# Altium PCB DDS_RIKEN_2014.PcbDoc (part 1 of 3)
Units mm, origin at the board's own origin, x right, y up, seen from the top; angles counter-clockwise.
Board outline 224 x 140 mm, 4 copper layers (TopLayer, Ground, Power, BottomLayer); 166 components, 282 nets, 1126 pads, 429 vias.
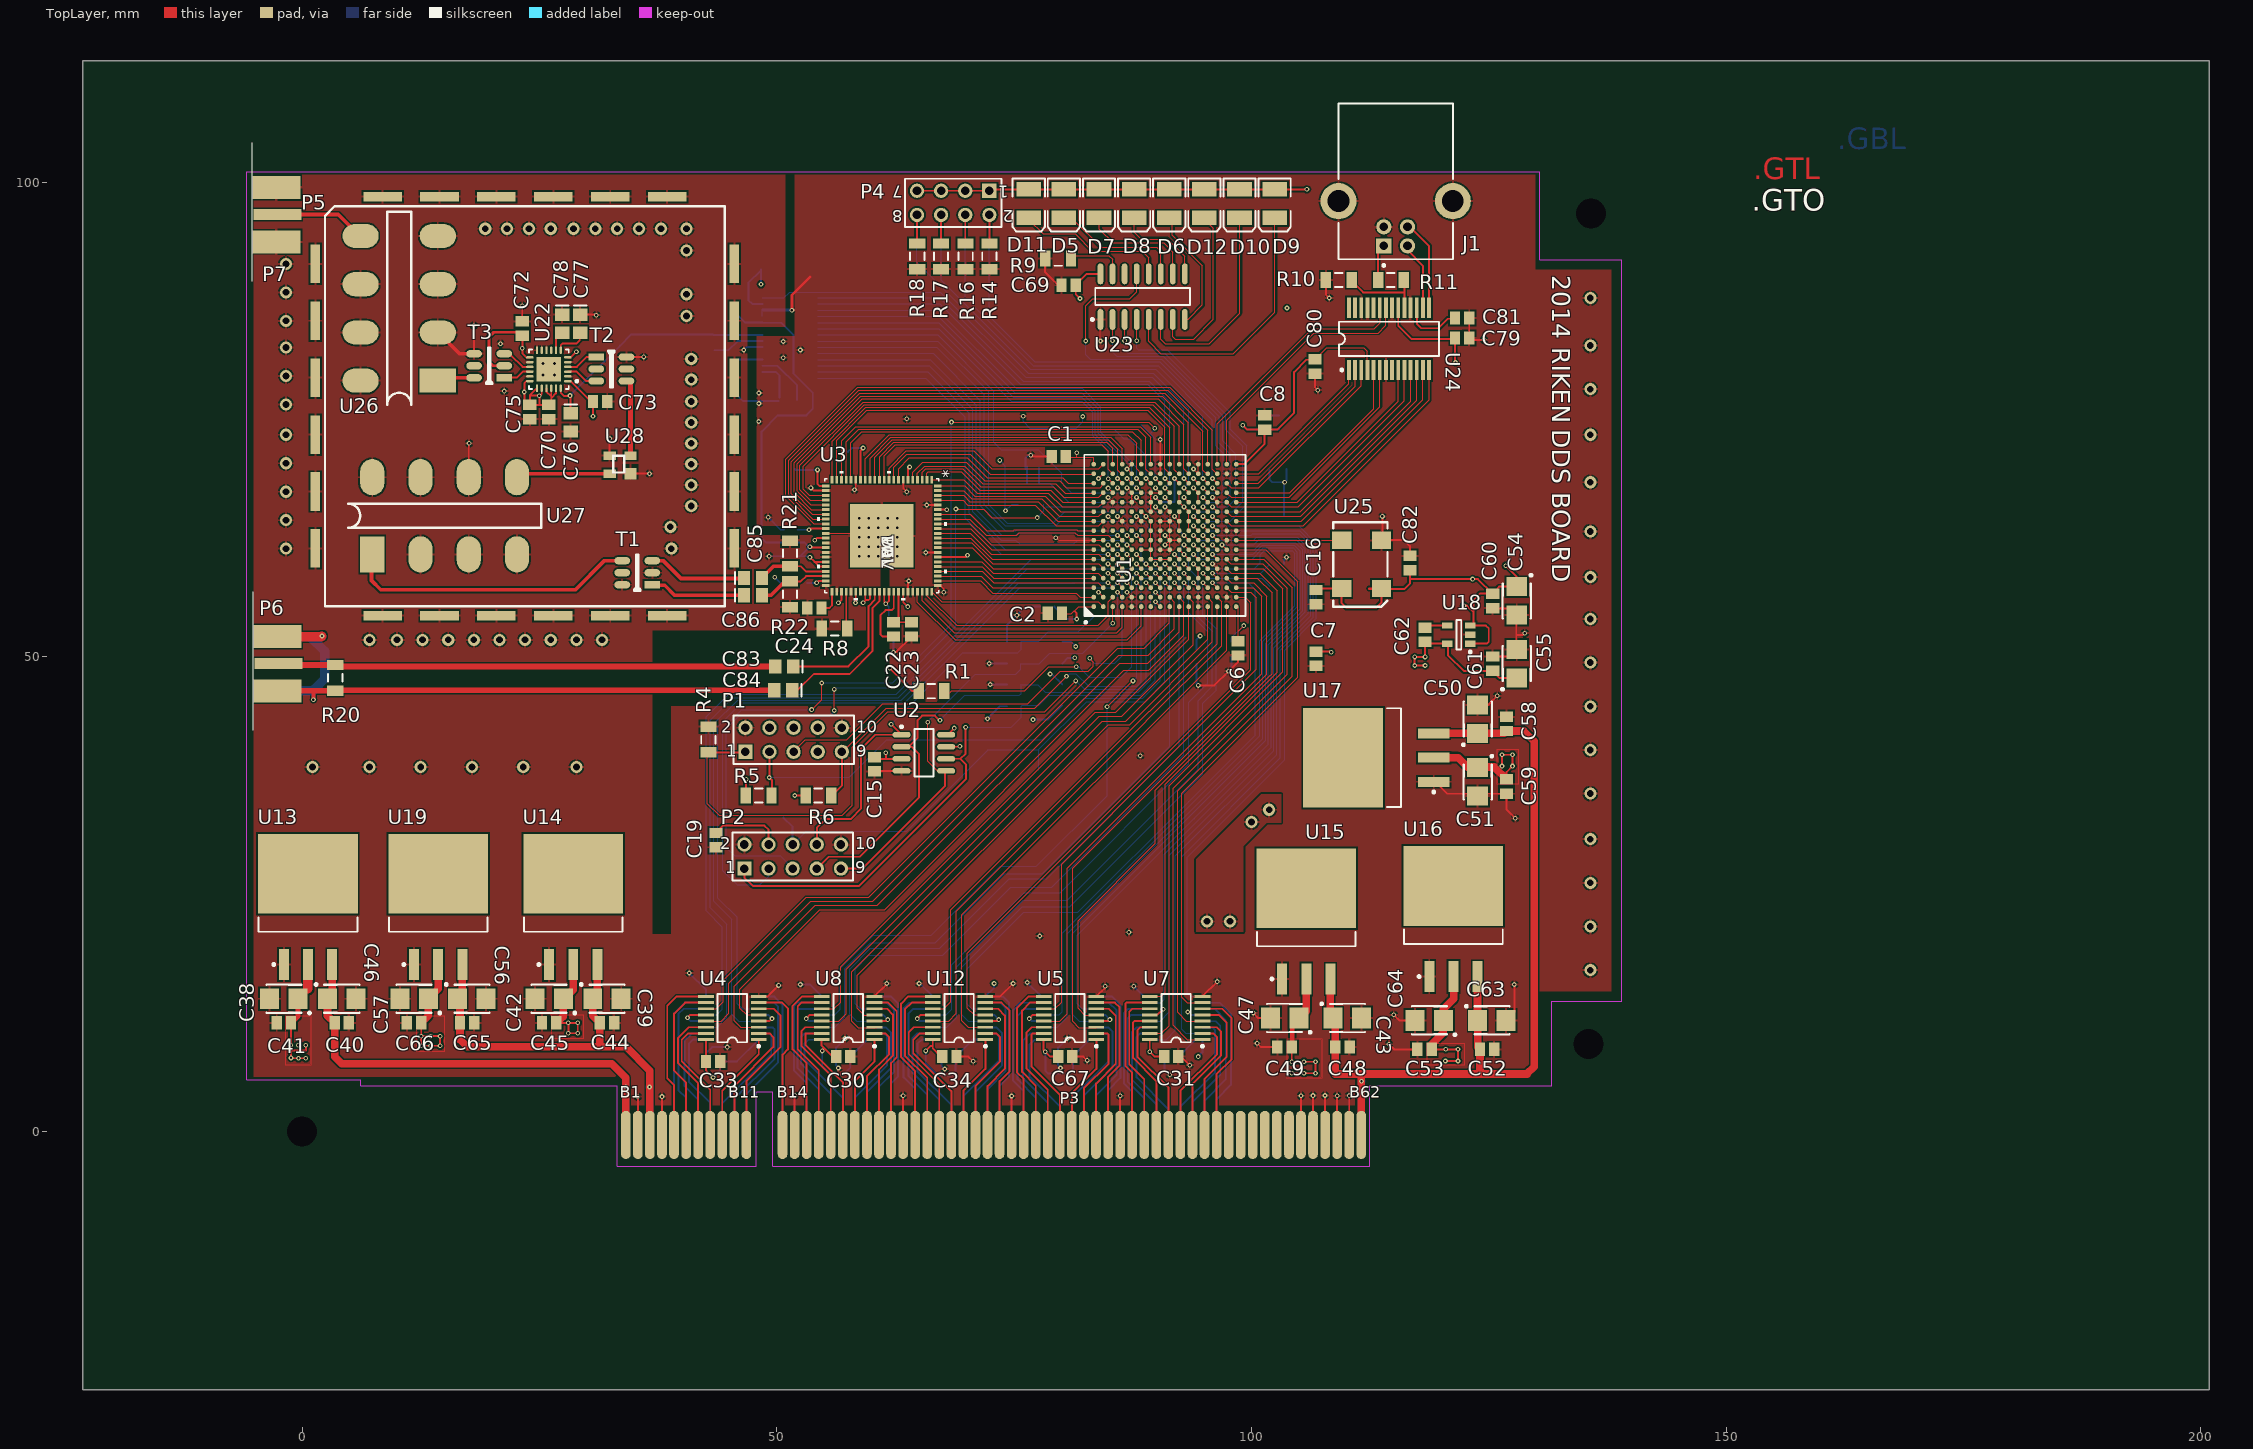
[diagram p0: TopLayer view]
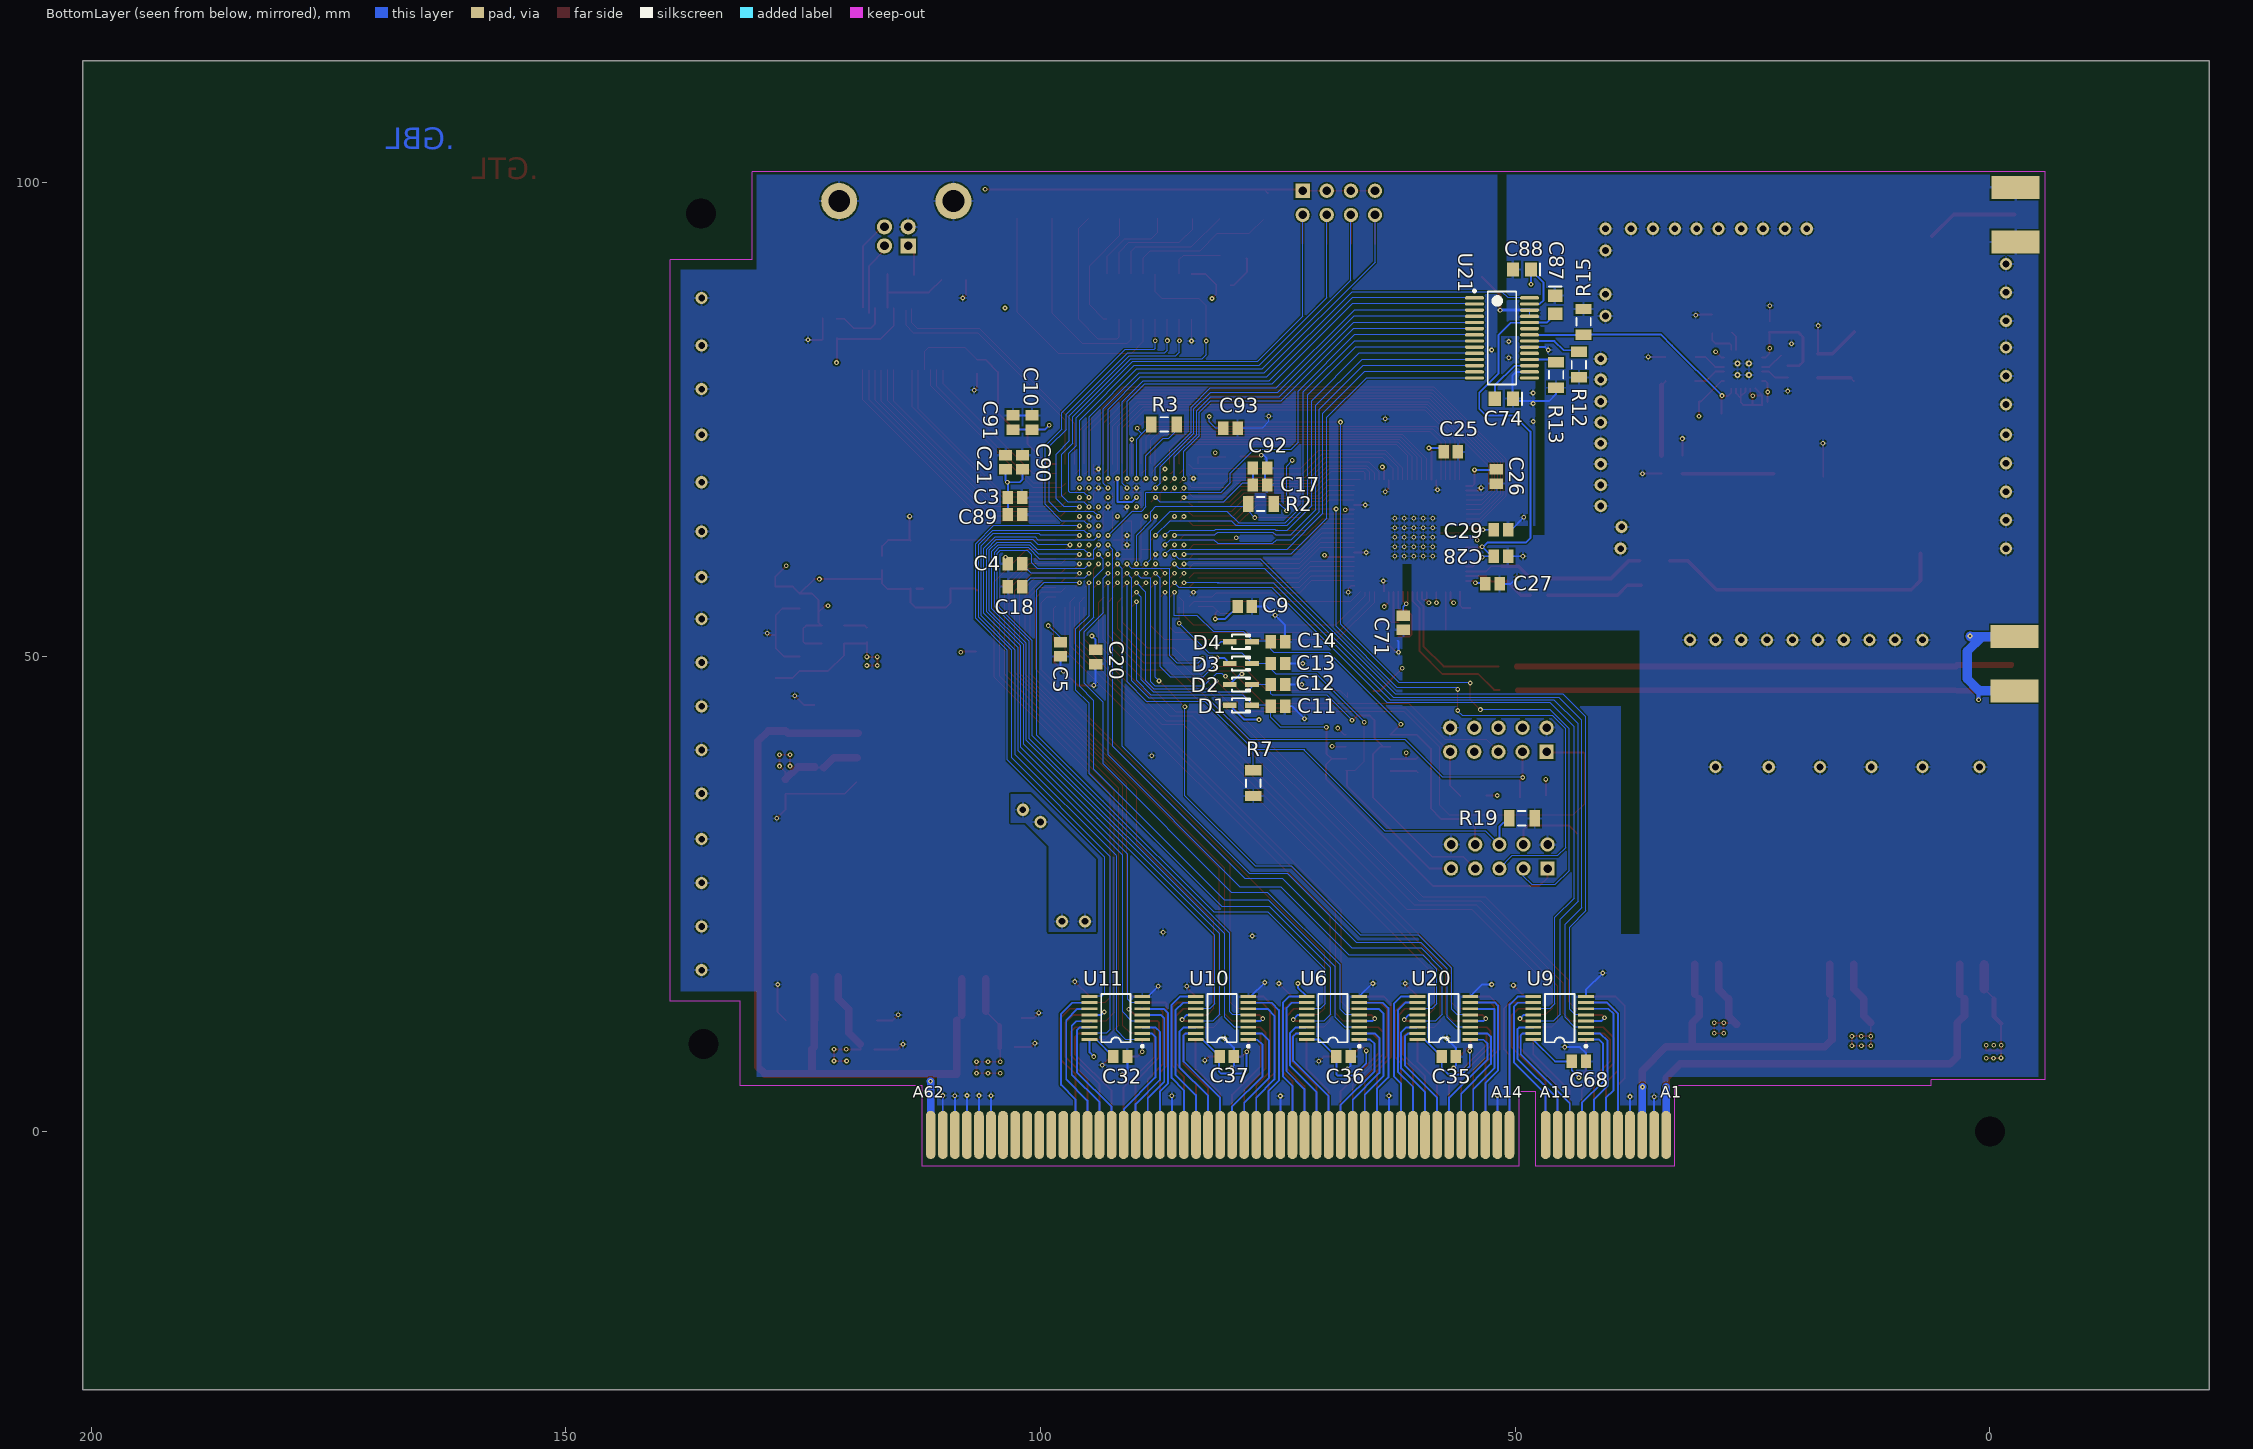
[diagram p1: BottomLayer view, seen from below]
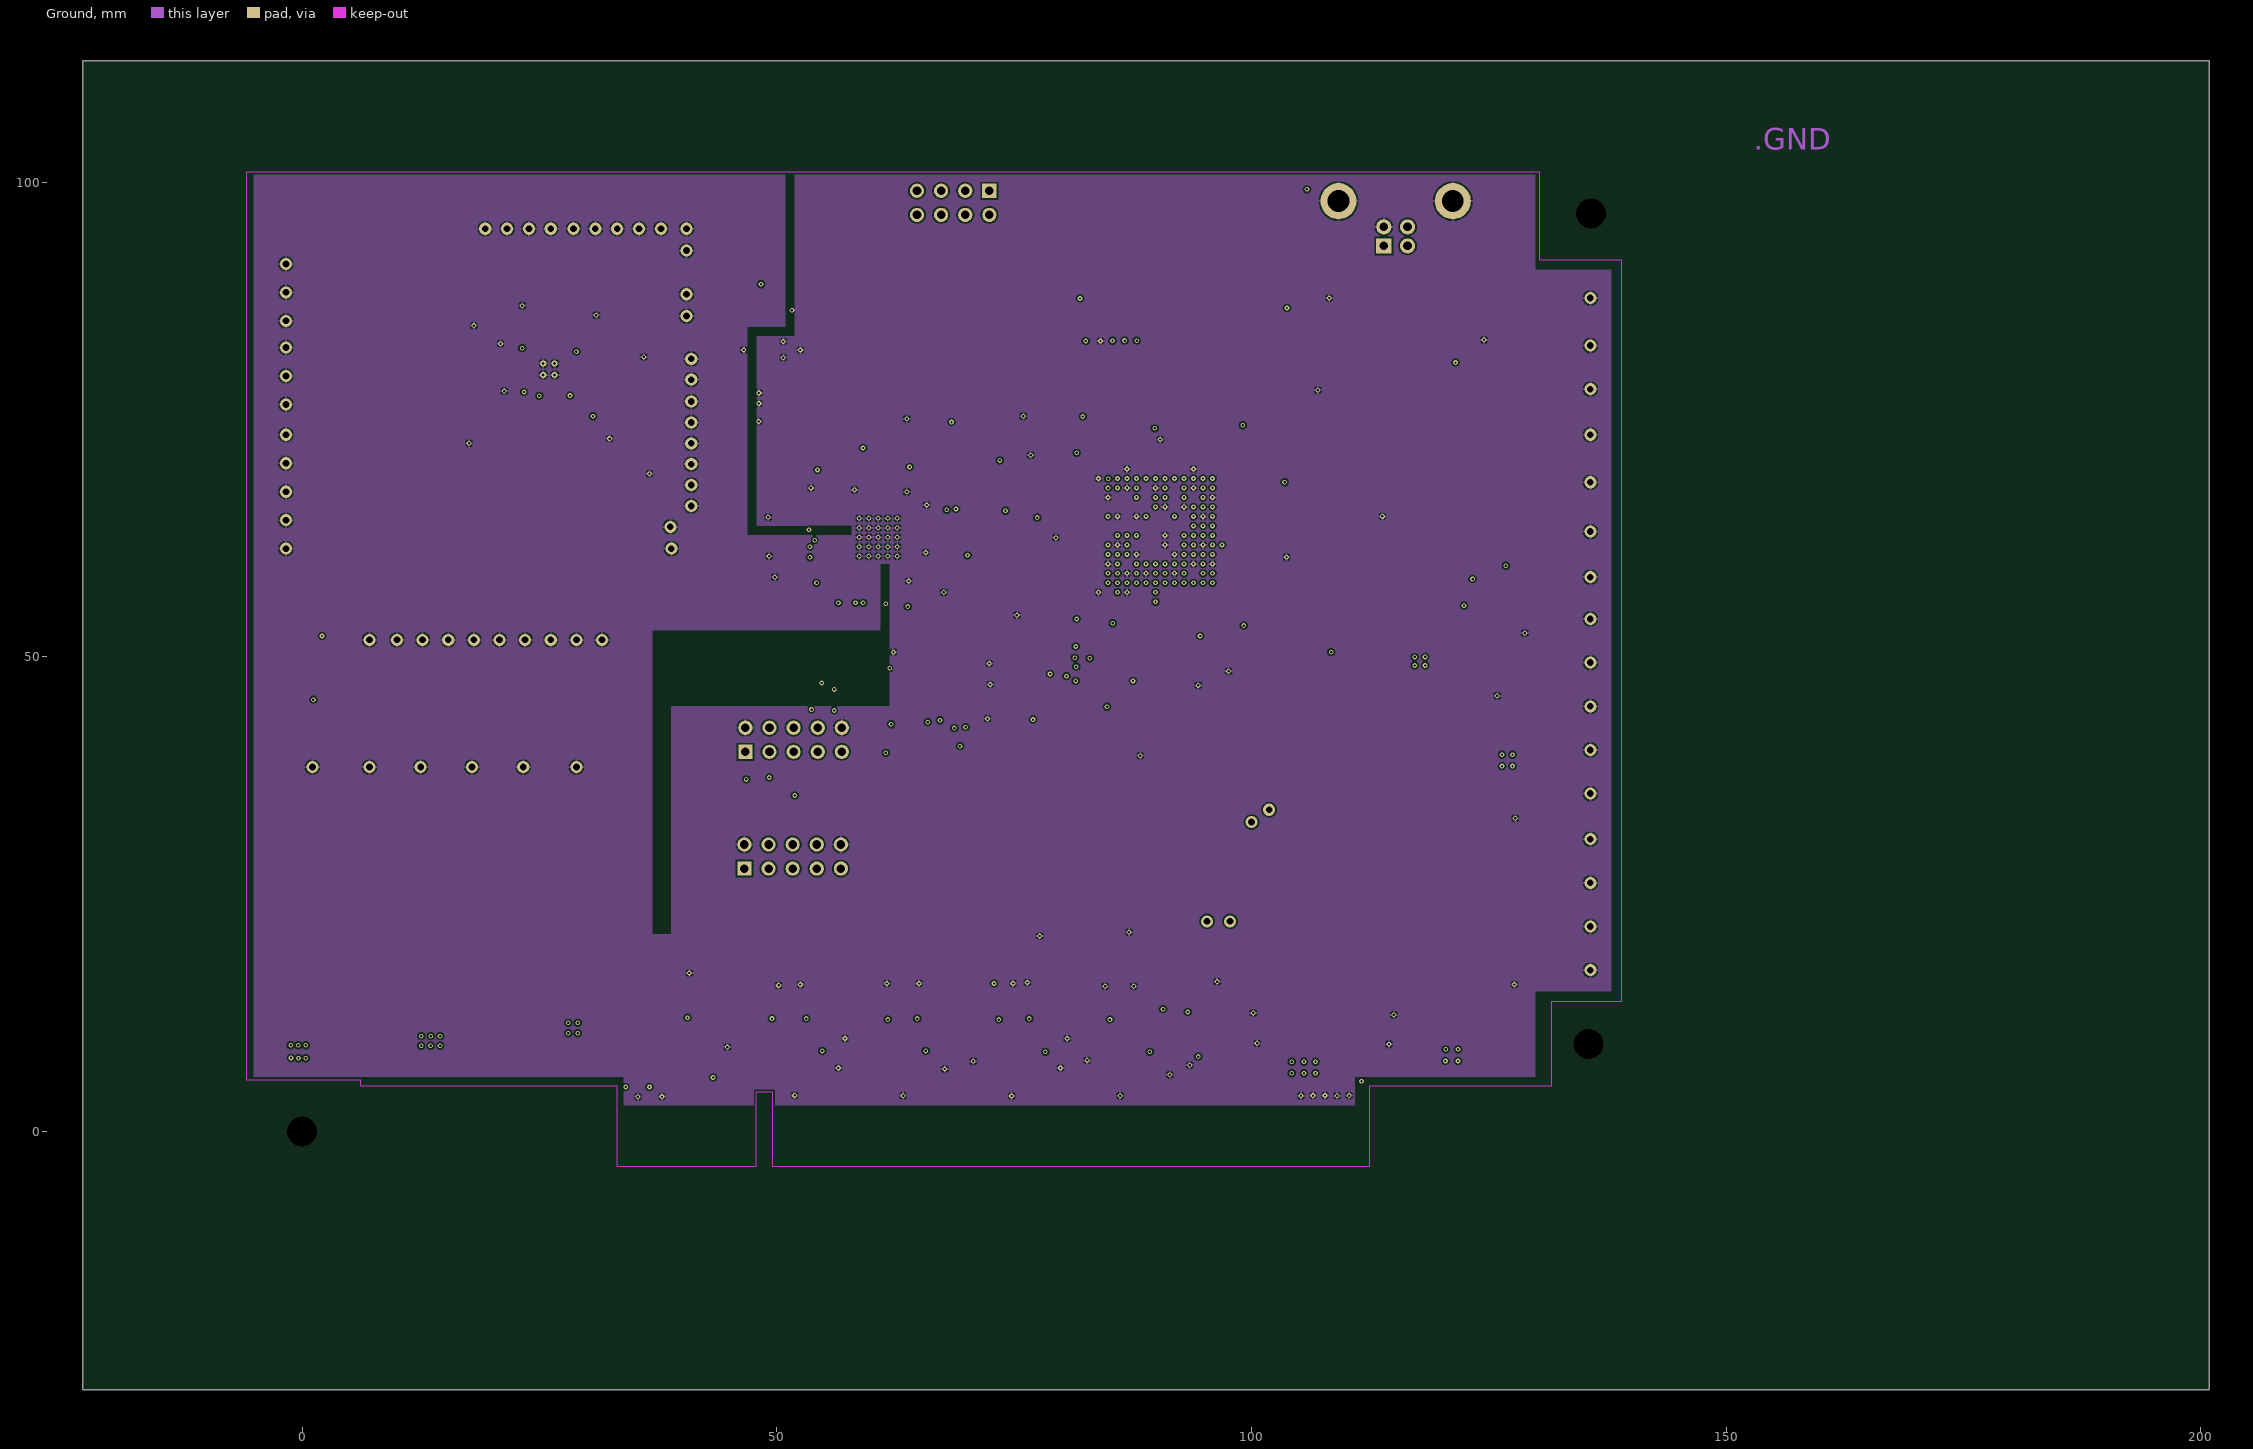
[diagram p2: Ground]
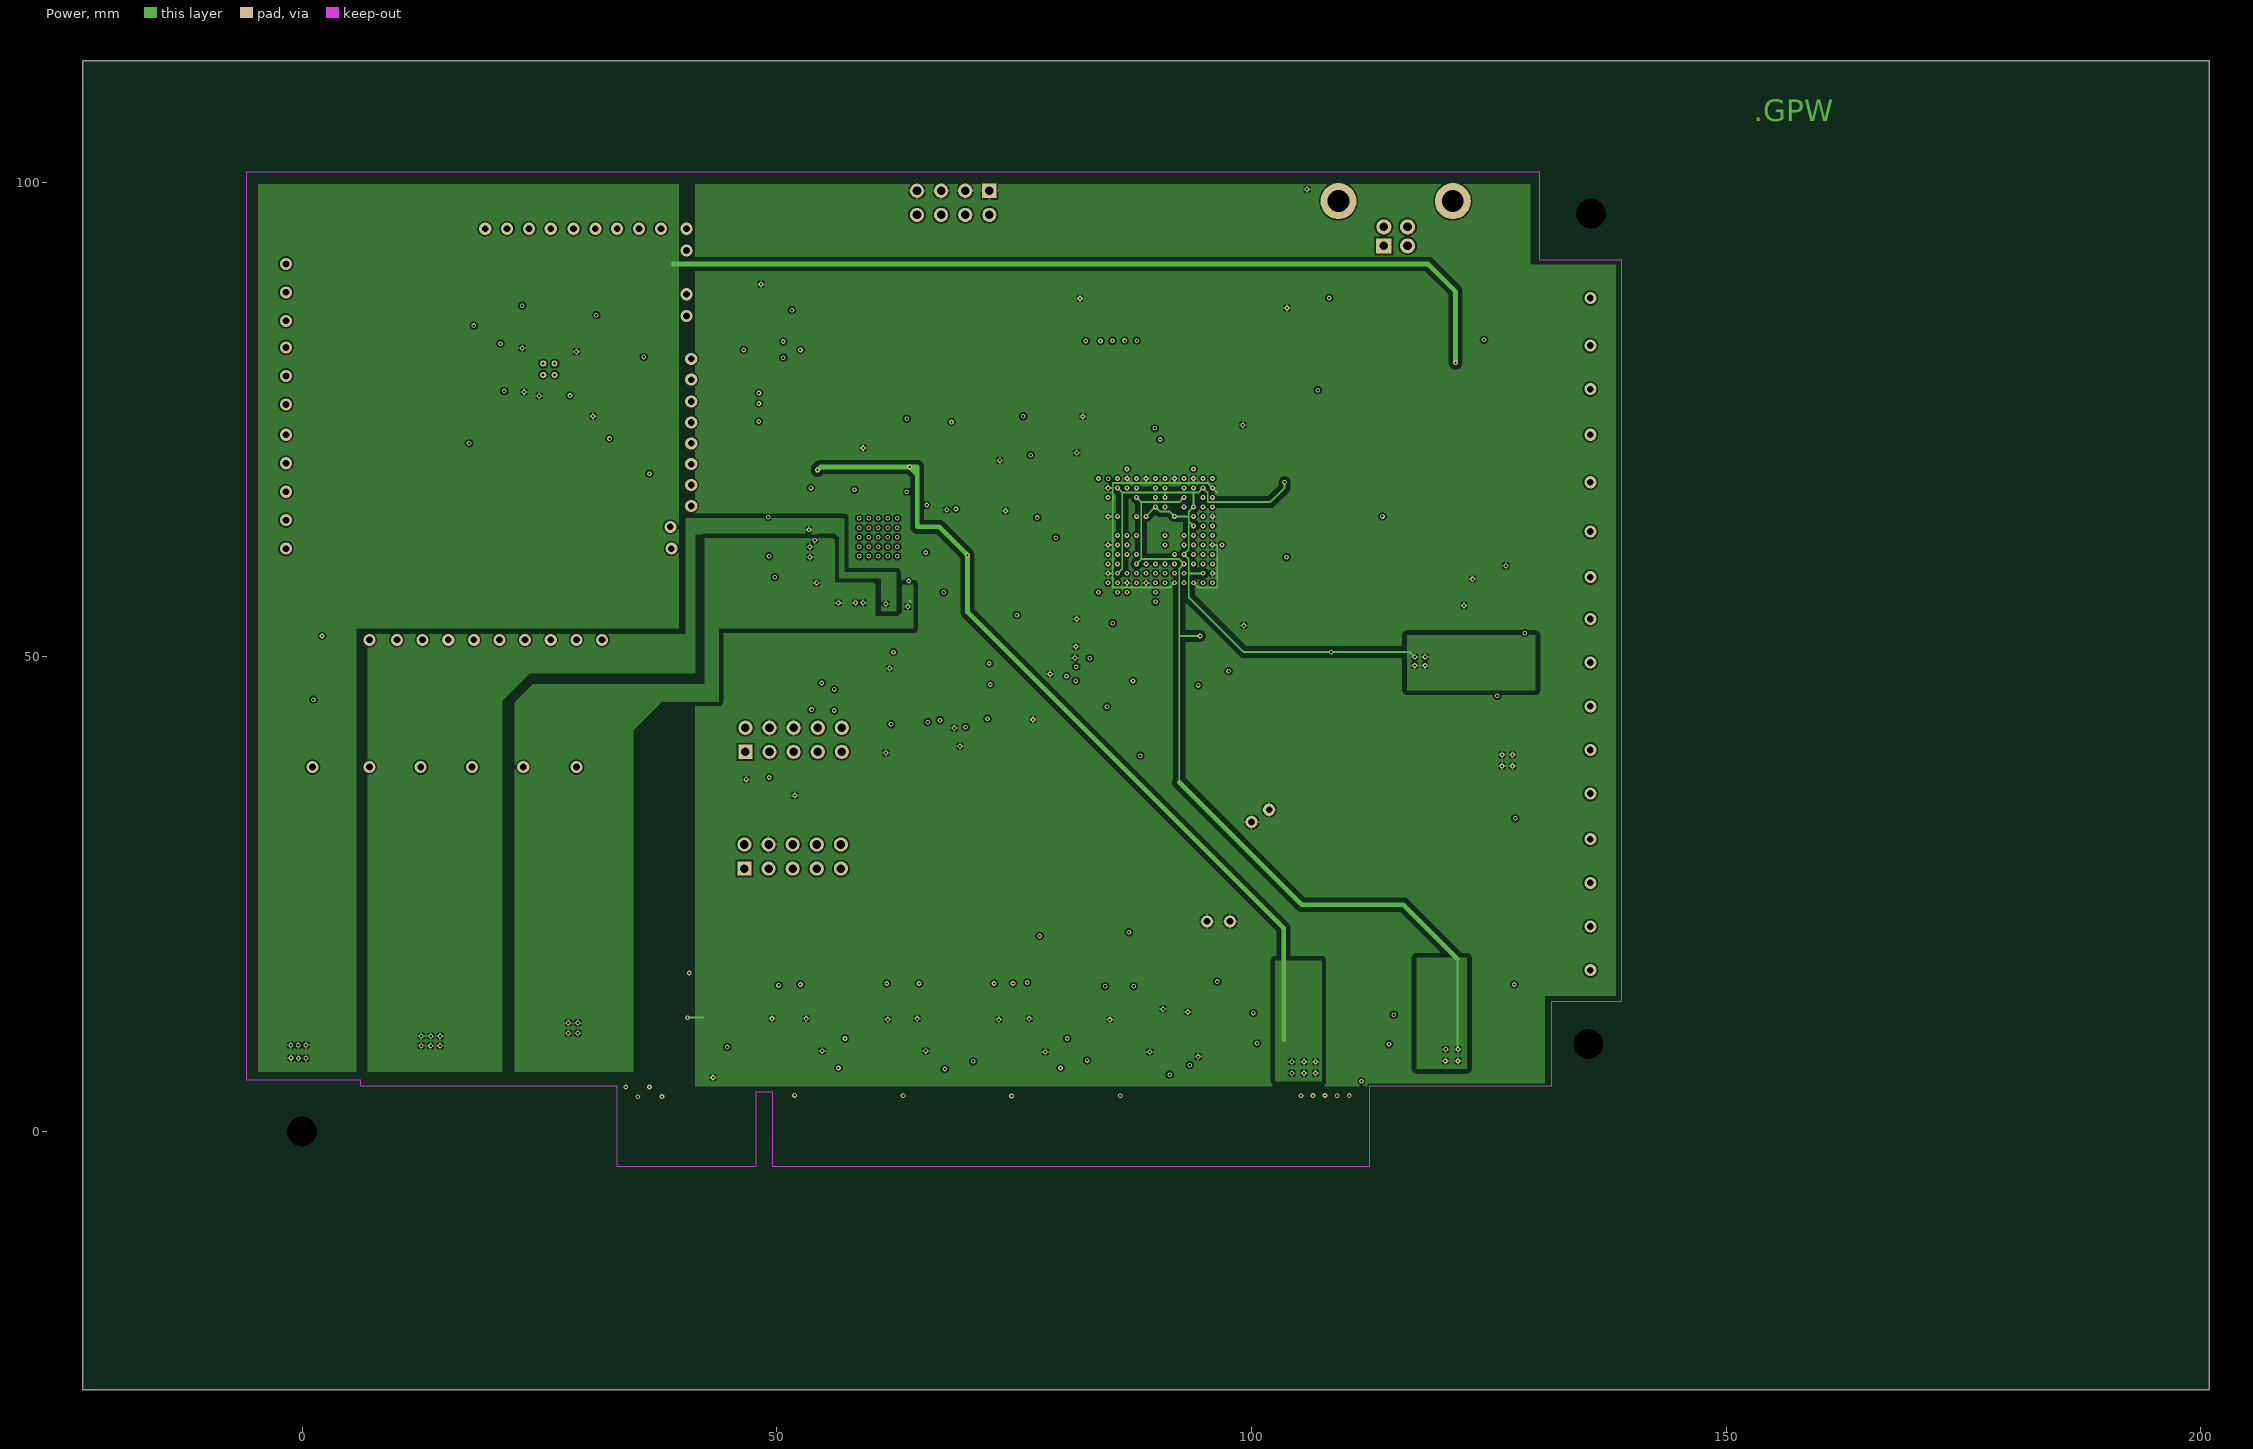
[diagram p3: Power]

## Layer stack, top to bottom
TopLayer: signal copper 0.0356
Dielectric: core 0.32, FR-4, Dk 4.8
Ground: signal copper 0.0356
Dielectric: prepreg 0.32, FR-4, Dk 4.8
Power: signal copper 0.0356
Dielectric: core 0.32, FR-4, Dk 4.8
BottomLayer: signal copper 0.0356

## Board outline
-23.1,112.775 200.9,112.775 200.9,-27.225 -23.1,-27.225

## Design rules (kind name [scope] priority, off if disabled: settings)
AssemblyTestPointUsage AssemblyTestPointUsage_1 [All] p2:
AssemblyTestpoint AssemblyTestpoint_1 [All] p2: testpointundercomponent=TRUE minsize=1.016 maxsize=2.54 preferedsize=1.524 minholesize=0 maxholesize=1.016 preferedholesize=0.813 testpointgrid=0.025 usegrid=TRUE gridtolerance=0 allowsidetop=TRUE allowsidebottom=TRUE
Clearance PolygonClearance2 [InPolygon vs OnLayer('Power')] p1: gap=0.5
Clearance PolygonClearance [InPolygon] p2: gap=0.175
Clearance [All] p3: gap=0.127
ComponentClearance ComponentClearance_1 [All] p2: gap=0.254 collisioncheckmode=3 verticalgap=0.254 showdistances=FALSE
DiffPairsRouting DiffPairsRouting_1 [All] p2: maxlimit=0.254 minlimit=0.254 mostfreqgap=0.254 maxuncoupledlength=12.7
FabricationTestPointUsage TestPointUsage [All] p2: valid=0 allowmultiple=FALSE
FabricationTestpoint Testpoint [All] p2: side=3 testpointundercomponent=TRUE minsize=1.016 maxsize=2.54 preferedsize=1.524 minholesize=0.508 maxholesize=1.016 preferedholesize=0.813 testpointgrid=0.025 allowsidetop=TRUE allowsidebottom=TRUE usegrid=TRUE gridtolerance=0
FanoutControl Fanout_LCC [IsLCC] p1: bgadir=Out bgaviamode=Centered fanoutstyle=Auto fanoutdirection=Alternating viagrid=0.025 // Fanout_LCC (Default Rule)
FanoutControl Fanout_BGA [IsBGA] p2: bgadir=Out bgaviamode=Centered fanoutstyle=Auto fanoutdirection=Alternating viagrid=0.025 // Fanout_BGA (Default Rule)
FanoutControl Fanout_Small [(CompPinCount < 5)] p3: bgadir=Out bgaviamode=Centered fanoutstyle=Auto fanoutdirection=OutThenIn viagrid=0.025 // Fanout_Small (Default Rule)
FanoutControl Fanout_SOIC [IsSOIC] p4: bgadir=Out bgaviamode=Centered fanoutstyle=Auto fanoutdirection=Alternating viagrid=0.025 // Fanout_SOIC (Default Rule)
FanoutControl Fanout_BGA_1 [IsBGA] p6: bgadir=Out bgaviamode=Centered fanoutstyle=Auto fanoutdirection=Alternating viagrid=0.025 // Fanout_BGA (Default Rule)
FanoutControl Fanout_LCC_1 [IsLCC] p7: bgadir=Out bgaviamode=Centered fanoutstyle=Auto fanoutdirection=Alternating viagrid=0.025 // Fanout_LCC (Default Rule)
FanoutControl Fanout_SOIC_1 [IsSOIC] p8: bgadir=Out bgaviamode=Centered fanoutstyle=Auto fanoutdirection=Alternating viagrid=0.025 // Fanout_SOIC (Default Rule)
FanoutControl Fanout_Small_1 [(CompPinCount < 5)] p9: bgadir=Out bgaviamode=Centered fanoutstyle=Auto fanoutdirection=OutThenIn viagrid=0.025 // Fanout_Small (Default Rule)
FanoutControl Fanout_Default_1 [All] p10: bgadir=Out bgaviamode=Centered fanoutstyle=Auto fanoutdirection=Alternating viagrid=0.025 // Fanout_Default (Default Rule)
Height Height_1 [All] p2: minheight=0 maxheight=25.4 prefheight=12.7
HoleSize [All] p1: absolutevalues=TRUE maxlimit=2.54 minlimit=0.3 maxpercent=80.000 minpercent=20.000
HoleSize HoleSize_1 [All] p2: absolutevalues=TRUE maxlimit=2.54 minlimit=0.3 maxpercent=80.000 minpercent=20.000
HoleToHoleClearance HoleToHoleClearance_1 [All] p2: gap=0.254 allowstackedmicrovias=TRUE
LayerPairs LayerPairs_1 [All] p2: enforce=TRUE
MinimumSolderMaskSliver MinimumSolderMaskSliver_1 [All] p2: minsoldermaskwidth=0.254
NetAntennae NetAntennae_1 [All] p2: netantennaetolerance=0
PasteMaskExpansion PasteMaskExpansion_1 [InComponent('P1')] p2: expansion=-2.54
PasteMaskExpansion PasteMaskExpansion_2 [All] p3: expansion=0
PlaneClearance PlaneClearance_1 [All] p2: clearance=0.254
PolygonConnect [All] p1: connectstyle=Relief reliefconductorwidth=0.254 reliefentries=4 polygonreliefangle="90 Angle"
PolygonConnect PolygonConnect_1 [All] p2: connectstyle=Relief reliefconductorwidth=0.254 reliefentries=4 polygonreliefangle="90 Angle"
RoomDefinition USB1 [InComponentClass('USB1')] p1: confinementstyle=ConfineIn formatcopy=TRUE lockcomponents=FALSE outline 124.925,-14.6 150.075,-14.6 150.075,-9.125 124.925,-9.125
RoomDefinition Power [InComponentClass('Power')] p2: confinementstyle=ConfineIn formatcopy=TRUE lockcomponents=FALSE outline -5.468,9 36.125,9 36.125,32.513 -5.468,32.513
RoomDefinition FPGA [InComponentClass('FPGA')] p3: confinementstyle=ConfineIn formatcopy=TRUE lockcomponents=FALSE outline 150.3,-8.2 142.775,-8.2 142.775,2.75 150.3,2.75
RoomDefinition DDS_RIKEN_main [InComponentClass('DDS_RIKEN_main')] p4: confinementstyle=ConfineIn formatcopy=TRUE lockcomponents=FALSE outline 139.25,0.875 125.9,0.875 125.9,-6.375 139.25,-6.375
RoutingLayers [All] p1: top layer_v5=TRUE mid layer 7_v5=FALSE mid layer 8_v5=FALSE bottom layer_v5=TRUE
RoutingPriority RoutingPriority_1 [All] p2: routingpriority=0
RoutingTopology RoutingTopology_1 [All] p2: topology=Shortest
RoutingVias [All] p1: holewidth=0.25 width=0.5 viastyle="Through Hole" minholewidth=0.25 minwidth=0.5 maxholewidth=0.711 maxwidth=1.27
ShortCircuit ShortCircuit_1 [All] p2: allowed=FALSE
SilkToSilkClearance SilkToSilkClearance_1 [All] p2: silktosilkclearance=0.254
SilkscreenOverComponentPads [All] p1: minsilkscreentomaskgap=0.254
SilkscreenOverComponentPads SilkscreenOverComponentPads_1 [All] p2: minsilkscreentomaskgap=0.254
SolderMaskExpansion [All] p1: expansion=0.102
SolderMaskExpansion SolderMaskExpansion_1 [All] p2: expansion=0.051
UnRoutedNet UnRoutedNet_1 [All] p2:
Width [All] p1: maxlimit=1 minlimit=0.125 preferedwidth=0.125
21 further rules are at their usual default settings.

## Classes and differential pairs
component class Power: C38 C39 C40 C41 C42 C43 C44 C45 C46 C47 C48 C49 C50 C51 C52 C53 C54 C55 C56 C57 C58 C59 C60 C61 C62 C63 C64 C65 C66 U13 U14 U15 U16 U17 U18 U19
component class DDS_RIKEN_main: C22 C23 C24 C25 C26 C27 C28 C29 C30 C31 C32 C33 C34 C35 C36 C37 C67 C68 C69 C70 C71 C72 C73 C74 C75 C76 C77 C78 C83 C84 C85 C86 C87 C88 C? D5 D6 D7 D8 D9 D10 D11 D12 P3 P4 P5 P6 P7 R8 R9 R12 R13 R14 R15 R16 R17 R18 R20 R21 R22 T1 T2 T3 U3 U4 U5 U6 U7 U8 U9 U10 U11 U12 U20 U21 U22 U23 U26 U27 U28
net class IOB8_[21..0]: IOB8_0 IOB8_1 IOB8_2 IOB8_3 IOB8_4 IOB8_5 IOB8_6 IOB8_7 IOB8_8 IOB8_9 IOB8_10 IOB8_11 IOB8_12 IOB8_13 IOB8_14 IOB8_15 IOB8_16 IOB8_17 IOB8_18 IOB8_19 IOB8_20 IOB8_21
net class IOB7_[21..0]: IOB7_0 IOB7_1 IOB7_2 IOB7_3 IOB7_4 IOB7_5 IOB7_6 IOB7_7 IOB7_8 IOB7_9 IOB7_10 IOB7_11 IOB7_12 IOB7_13 IOB7_14 IOB7_15 IOB7_16 IOB7_17 IOB7_18 IOB7_19 IOB7_20 IOB7_21
net class IOB6_[10..0]: IOB6_0 IOB6_1 IOB6_2 IOB6_3 IOB6_4 IOB6_5 IOB6_6 IOB6_7 IOB6_8 IOB6_9 IOB6_10
net class IOB5_[15..0]: IOB5_0 IOB5_1 IOB5_2 IOB5_3 IOB5_4 IOB5_5 IOB5_6 IOB5_7 IOB5_8 IOB5_9 IOB5_10 IOB5_11 IOB5_12 IOB5_13 IOB5_14 IOB5_15
net class IOB4_[17..0]: IOB4_0 IOB4_1 IOB4_2 IOB4_3 IOB4_4 IOB4_5 IOB4_6 IOB4_7 IOB4_8 IOB4_9 IOB4_10 IOB4_11 IOB4_12 IOB4_13 IOB4_14 IOB4_15 IOB4_16 IOB4_17
net class IOB3_[22..0]: IOB3_0 IOB3_1 IOB3_2 IOB3_3 IOB3_4 IOB3_5 IOB3_6 IOB3_7 IOB3_8 IOB3_9 IOB3_10 IOB3_11 IOB3_12 IOB3_13 IOB3_14 IOB3_15 IOB3_16 IOB3_17 IOB3_18 IOB3_19 IOB3_20 IOB3_21 IOB3_22
net class IOB2_[13..0]: IOB2_0 IOB2_1 IOB2_2 IOB2_3 IOB2_4 IOB2_5 IOB2_6 IOB2_7 IOB2_8 IOB2_9 IOB2_10 IOB2_11 IOB2_12 IOB2_13
net class IOB1_[8..0]: IOB1_0 IOB1_1 IOB1_2 IOB1_3 IOB1_4 IOB1_5 IOB1_6 IOB1_7 IOB1_8
component class FPGA: C1 C2 C3 C4 C5 C6 C7 C8 C9 C10 C11 C12 C13 C14 C15 C16 C17 C18 C19 C20 C21 C82 C89 C90 C91 C92 C93 D1 D2 D3 D4 P1 P2 R1 R2 R3 R4 R5 R6 R7 R19 U1 U2 U25
component class USB1: C79 C80 C81 J1 R10 R11 U24

## Components (designator, comment, footprint, x,y, rotation, side; value= is the part's Value field where it differs from the comment)
C1 "Cap Semi" CAPC2012L 79.7,71.075 r0 top
C2 "Cap Semi" CAPC2012L 79.3,54.575 r0 top
C3 "Cap Semi" CAPC2012L 102.7,66.775 r180 bottom
C4 "Cap Semi" CAPC2012L 102.7,59.775 r180 bottom
C5 "Cap Semi" CAPC2012L 97.9,50.775 r90 bottom
C6 "Cap Semi" CAPC2012L 98.6,50.875 r90 top
C7 "Cap Semi" CAPC2012L 106.8,49.775 r270 top
C8 "Cap Semi" CAPC2012L 101.4,74.675 r270 top
C9 "Cap Semi" CAPC2012L 78.5,55.275 r0 bottom
C10 "Cap Semi" CAPC2012L 100.9,74.675 r270 bottom
C11 "Cap Semi" CAPC2012L 75,44.775 r180 bottom
C12 "Cap Semi" CAPC2012L 75,47.075 r180 bottom
C13 "Cap Semi" CAPC2012L 75,49.275 r180 bottom
C14 "Cap Semi" CAPC2012L 75,51.575 r180 bottom
C15 "Cap Semi" CAPC2012L 60.3,38.675 r270 top
C16 "Cap Semi" CAPC2012L 106.8,56.275 r270 top
C17 "Cap Semi" CAPC2012L 76.9,68.075 r0 bottom
C18 "Cap Semi" CAPC2012L 102.7,57.375 r180 bottom
C19 "Cap Semi" CAPC2012L 43.6,30.675 r270 top
C20 "Cap Semi" CAPC2012L 94.2,49.975 r270 bottom
C21 "Cap Semi" CAPC2012L 103.7,70.475 r270 bottom
C22 "Cap Semi" CAPC2012L 62.3,52.875 r90 top
C23 "Cap Semi" CAPC2012L 64.2,52.875 r270 top
C24 "Cap Semi" CAPC2012L 53.968,55.119 r0 top
C25 "Cap Semi" CAPC2012L 56.8,71.575 r180 bottom
C26 "Cap Semi" CAPC2012L 52,68.975 r270 bottom
C27 "Cap Semi" CAPC2012L 52.4,57.675 r180 bottom
C28 "Cap Semi" CAPC2012L 51.5,60.575 r180 bottom
C29 "Cap Semi" CAPC2012L 51.5,63.375 r180 bottom
C30 "Cap Semi" CAPC2012L 57.016,7.875 r0 top
C31 "Cap Semi" CAPC2012L 91.56,7.875 r0 top
C32 "Cap Semi" CAPC2012L 91.6,7.875 r180 bottom
C33 "Cap Semi" CAPC2012L 43.3,7.367 r0 top
C34 "Cap Semi" CAPC2012L 68.192,7.875 r0 top
C35 "Cap Semi" CAPC2012L 57,7.875 r180 bottom
C36 "Cap Semi" CAPC2012L 68.1,7.875 r180 bottom
C37 "Cap Semi" CAPC2012L 80.4,7.875 r180 bottom
C38 "Cap Pol1" B -1.912,13.971 r180 top
C39 "Cap Pol1" B 32.124,13.971 r0 top
C40 "Cap Semi" CAPC2012L 4.184,11.431 r180 top
C41 "Cap Semi" CAPC2012L -1.912,11.431 r0 top
C42 "Cap Pol1" B 26.028,13.971 r180 top
C43 "Cap Pol1" B 110.102,11.939 r0 top
C44 "Cap Semi" CAPC2012L 32.124,11.431 r180 top
C45 "Cap Semi" CAPC2012L 26.028,11.431 r0 top
C46 "Cap Pol1" B 4.184,13.971 r0 top
C47 "Cap Pol1" B 103.498,11.939 r180 top
C48 "Cap Semi" CAPC2012L 109.594,8.891 r180 top
C49 "Cap Semi" CAPC2012L 103.498,8.891 r0 top
C50 "Cap Pol1" B 123.83,43.428 r90 top
C51 "Cap Pol1" B 123.83,36.824 r270 top
C52 "Cap Semi" CAPC2012L 124.834,8.637 r180 top
C53 "Cap Semi" CAPC2012L 118.23,8.637 r0 top
C54 "Cap Pol1" B 127.95,55.874 r270 top
C55 "Cap Pol1" B 127.95,49.27 r90 top
C56 "Cap Pol1" B 17.9,13.971 r0 top
C57 "Cap Pol1" B 11.804,13.971 r180 top
C58 "Cap Semi" CAPC2012L 126.878,42.92 r270 top
C59 "Cap Semi" CAPC2012L 126.878,36.316 r90 top
C60 "Cap Semi" CAPC2012L 125.41,55.874 r90 top
C61 "Cap Semi" CAPC2012L 125.41,49.27 r270 top
C62 "Cap" CAPC2012L 118.298,52.318 r90 top
C63 "Cap Pol1" B 125.342,11.685 r0 top
C64 "Cap Pol1" B 118.738,11.685 r180 top
C65 "Cap Semi" CAPC2012L 17.392,11.431 r180 top
C66 "Cap Semi" CAPC2012L 11.804,11.431 r0 top
C67 "Cap Semi" CAPC2012L 80.384,7.875 r0 top
C68 "Cap Semi" CAPC2012L 43.3,7.375 r180 bottom
C69 "Cap Semi" CAPC2012L 80.75,89.125 r180 top
C70 "Cap Semi" CAPC2012L 26,75.775 r90 top
C71 "Cap Semi" CAPC2012L 61.8,53.575 r270 bottom
C72 "Cap Semi" CAPC2012L 23.2,84.575 r90 top
C73 "Cap Semi" CAPC2012L 31.4,76.875 r0 top
C74 "Cap" c0805 51.2,77.175 r0 bottom
C75 "Cap Semi" CAPC2012L 24,75.775 r270 top
C76 "Cap" c0805 28.3,74.675 r270 top
C77 "Cap" c0805 29.3,85.075 r270 top
C78 "Cap" c0805 27.4,85.075 r270 top
C79 "Cap Semi" CAPC2012L 122.2,83.575 r180 top
C80 "Cap Semi" CAPC2012L 106.7,80.575 r90 top
C81 "Cap Semi" CAPC2012L 122.2,85.675 r0 top
C82 "Cap Semi" CAPC2012L 116.7,59.875 r270 top
C83 "Cap" c0805 50.8,48.975 r180 top
C84 "Cap" c0805 50.7,46.475 r180 top
C85 "Cap" c0805 47.5,58.275 r0 top
C86 "Cap" c0805 47.5,56.475 r0 top
C87 "Cap" c0805 45.8,87.075 r270 bottom
C88 "Cap" c0805 49.3,90.775 r0 bottom
C89 "Cap Semi" CAPC2012L 102.7,64.975 r180 bottom
C90 "Cap Semi" CAPC2012L 101.9,70.475 r90 bottom
C91 "Cap Semi" CAPC2012L 102.9,74.675 r270 bottom
C92 "Cap Semi" CAPC2012L 76.9,69.875 r0 bottom
C93 "Cap Semi" CAPC2012L 80,74.075 r0 bottom
D1 "1PS76SB17" SOD323 78.9,44.875 r180 bottom
D2 "1PS76SB17" SOD323 78.9,47.075 r180 bottom
D3 "1PS76SB17" SOD323 78.9,49.275 r180 bottom
D4 "1PS76SB17" SOD323 78.9,51.575 r180 bottom
D5 "LED3" DSO-C2/D5.6 80.25,97.725 r270 top
D6 "LED3" DSO-C2/D5.6 91.35,97.725 r270 top
D7 "LED3" DSO-C2/D5.6 83.95,97.725 r270 top
D8 "LED3" DSO-C2/D5.6 87.65,97.725 r270 top
D9 "LED3" DSO-C2/D5.6 102.45,97.725 r270 top
D10 "LED3" DSO-C2/D5.6 98.75,97.725 r270 top
D11 "LED3" DSO-C2/D5.6 76.55,97.725 r270 top
D12 "LED3" DSO-C2/D5.6 95.05,97.725 r270 top
J1 "440119-2" 440119 115.2,94.275 r90 top
P1 "JTAG" HDR2X5 46.7,39.975 r0 top
P2 "ASCONFIG" HDR2X5 46.6,27.675 r0 top
P3 "PCI3V32BIT" PCI3V32BIT 34.105,-0.38 r0 top locked
P4 "DDS ADDRESS" HDR2X4 72.4,99.075 r180 top
P5 "EMI sheild" BMIS-207 1.4,91.375 r0 top
P6 "RF_IN" SMA_Edgecon_31milthick 6.3,53.675 r90 top
P7 "RF_OUT" SMA_Edgecon_31milthick 6.2,100.975 r90 top
R1 "" RESC3216L 66.3,46.375 r180 top
R2 "" RESC3216L 76.8,66.075 r180 bottom
R3 "" RESC3216L 87,74.475 r180 bottom
R4 "" RESC3216L 42.8,41.275 r90 top
R5 "" RESC3216L 48.1,35.375 r180 top
R6 "" RESC3216L 54.4,35.375 r180 top
R7 "" RESC3216L 77.6,36.675 r270 bottom
R8 "" RESC3216L 56.1,52.975 r180 top
R9 "" RESC3216L 79.65,91.925 r0 top
R10 "" RESC3216L 109.2,89.675 r0 top
R11 "" RESC3216L 114.7,89.675 r180 top
R12 "" RESC3216L 43.3,80.775 r270 bottom
R13 "" RESC3216L 45.7,79.675 r90 bottom
R14 "" RESC3216L 72.4,92.175 r270 top
R15 "" RESC3216L 42.8,85.275 r270 bottom
R16 "" RESC3216L 69.9,92.175 r270 top
R17 "" RESC3216L 67.3,92.175 r270 top
R18 "" RESC3216L 64.8,92.175 r270 top
R19 "" RESC3216L 49.3,32.975 r0 bottom
R20 "" RESC3216L 3.5,47.775 r90 top
R21 "" RESC3216L 51.4,60.875 r90 top
R22 "" RESC3216L 51.4,56.575 r90 top
T1 "TC1-1TX+" TC1-1T+ 36.9,57.575 r180 top
T2 "TC1-1TX+" TC1-1T+ 31,81.575 r0 top
T3 "TC1-1TX+" TC1-1T+ 21.3,79.375 r180 top
U1 "EP4CE22F17C8" FBGA256 90.9,62.775 r90 top
U2 "EPCS16SI8N" SOIC8_L 65.5,39.875 r0 top
U3 "AD9915BCPZ" CP_88_5 61.08,62.739 r270 top
U4 "MAX3094" TSSOP16 45.332,11.939 r90 top
U5 "MAX3094" TSSOP16 80.892,11.939 r90 top
U6 "MAX3094" TSSOP16 69.208,11.939 r90 bottom
U7 "MAX3030" TSSOP16 92.068,11.939 r90 top
U8 "MAX3094" TSSOP16 57.524,11.939 r90 top
U9 "MAX3094" TSSOP16 45.332,11.939 r90 bottom
U10 "MAX3094" TSSOP16 80.892,11.939 r90 bottom
U11 "MAX3030" TSSOP16 92.068,11.939 r90 bottom
U12 "MAX3094" TSSOP16 69.208,11.939 r90 top
U13 "LM1086IS-5.0" TS3B_N 0.628,23.623 r90 top
U14 "LM1086IS-3.3" TS3B_N 28.568,23.623 r90 top
U15 "LM1086IS-1.8" TS3B_N 105.784,22.099 r90 top
U16 "LM1086CS-2.5" TS3B_N 121.278,22.353 r90 top
U17 "LM1086IS-3.3" TS3B_N 113.162,39.364 r180 top
U18 "LP2983AIM5-1.2" MF05A_N 121.854,52.318 r180 top
U19 "LM1086IS-1.8" TS3B_N 14.344,23.623 r90 top
U20 "MAX3094" TSSOP16 57.524,11.939 r90 bottom
U21 "AD9744" TSOP65P640-28AM 51.4,83.575 r180 bottom
U22 "ADL5330" QFN50P400X400-24VAN 26,80.275 r180 top
U23 "TLC5917" D016_N 88.55,87.925 r90 top
U24 "IC_FT245RL" DB028 114.5,83.475 r0 top
U25 "CSX750F_25" CSX750F 113.7,57.175 r90 top
U26 "SALF-325" SALF-325 14.3,79.075 r180 top
U27 "SALF-325" SALF-325 7.4,60.775 r90 top
U28 "LAT-5+" LAT-10+ 32.4,69.275 r90 top

## Footprints (in the part's own frame and the unit in brackets; to place one, negate y for a bottom-side part, rotate by r counter-clockwise, add the part's x,y. Pads: shape width x height; smd on the part's side, far side on the other; paste and mask are expansions set on the pad)
440119 [mm] "Connector; USB1.1, Type B, Thru-Hole; 4 Position; Right Angle"
  rect 1.6x1.6 hole 0.92: 1(-1,1.25)
  round 1.6 hole 0.92: 2(-1,-1.25) 3(1,-1.25) 4(1,1.25)
  round 3.8 hole 2.3: 5(3.71,6.02) 6(3.71,-6.02)
  silkscreen extent -3.18,-6.02 13.99,6.02
B [mm] "Capacitor, SM Tantalum; Body 3.5 x 2.8 mm (LxW typ)"
  rect 2x2.2 smd: 1(-1.5,0) 2(1.5,0)
  silkscreen extent -2.83,-1.5 1.85,1.62
BMIS-207 [mil]
  rect 40x160 smd: 1(0,0) 2(0,-236) 3(0,-472) 4(0,-708) 5(0,-944) 6(0,-1180) 13(1738,-1180) 14(1738,-944) 15(1738,-708) 16(1738,-472) 17(1738,-236) 18(1738,0)
  rect 160x40 smd: 7(279,-1459) 8(515,-1459) 9(751,-1459) 10(987,-1459) 11(1223,-1459) 12(1459,-1459) 19(1459,279) 20(1223,279) 21(987,279) 22(751,279) 23(515,279) 24(279,279)
  silkscreen extent 40,-1419 1698,239
c0805 [mm] "Chip Capacitor; Body 2.0 x 1.2 mm (LxW typ)"
  rect 1.3x1.5 smd: 1(-0.95,0) 2(0.95,0)
  silkscreen extent -1.9,-0.65 -1.9,0.65
CAPC2012L [mm] "Chip Capacitor, Body 2.0x1.3mm, IPC High Density"
  rect 1.1x1.4 smd: 1(-0.75,0) 2(0.75,0)
  body extent -1.1,-0.72 1.1,0.72, height 1.4
CP_88_5 [mm]
  rect 0.805x0.3 smd: 1(-5.902,5.25) 2(-5.902,4.75) 3(-5.902,4.25) 4(-5.902,3.75) 5(-5.902,3.25) 6(-5.902,2.75) 7(-5.902,2.25) 8(-5.902,1.75) 9(-5.902,1.25) 10(-5.902,0.75) 11(-5.902,0.25) 12(-5.902,-0.25) 13(-5.902,-0.75) 14(-5.902,-1.25) 15(-5.902,-1.75) 16(-5.902,-2.25) 17(-5.902,-2.75) 18(-5.902,-3.25) 19(-5.902,-3.75) 20(-5.902,-4.25) 21(-5.902,-4.75) 22(-5.902,-5.25) 45(5.902,-5.25) 46(5.902,-4.75) 47(5.902,-4.25) 48(5.902,-3.75) 49(5.902,-3.25) 50(5.902,-2.75) 51(5.902,-2.25) 52(5.902,-1.75) 53(5.902,-1.25) 54(5.902,-0.75) 55(5.902,-0.25) 56(5.902,0.25) 57(5.902,0.75) 58(5.902,1.25) 59(5.902,1.75) 60(5.902,2.25) 61(5.902,2.75) 62(5.902,3.25) 63(5.902,3.75) 64(5.902,4.25) 65(5.902,4.75) 66(5.902,5.25)
  rect 0.3x0.805 smd: 23(-5.25,-5.902) 24(-4.75,-5.902) 25(-4.25,-5.902) 26(-3.75,-5.902) 27(-3.25,-5.902) 28(-2.75,-5.902) 29(-2.25,-5.902) 30(-1.75,-5.902) 31(-1.25,-5.902) 32(-0.75,-5.902) 33(-0.25,-5.902) 34(0.25,-5.902) 35(0.75,-5.902) 36(1.25,-5.902) 37(1.75,-5.902) 38(2.25,-5.902) 39(2.75,-5.902) 40(3.25,-5.902) 41(3.75,-5.902) 42(4.25,-5.902) 43(4.75,-5.902) 44(5.25,-5.902) 67(5.25,5.902) 68(4.75,5.902) 69(4.25,5.902) 70(3.75,5.902) 71(3.25,5.902) 72(2.75,5.902) 73(2.25,5.902) 74(1.75,5.902) 75(1.25,5.902) 76(0.75,5.902) 77(0.25,5.902) 78(-0.25,5.902) 79(-0.75,5.902) 80(-1.25,5.902) 81(-1.75,5.902) 82(-2.25,5.902) 83(-2.75,5.902) 84(-3.25,5.902) 85(-3.75,5.902) 86(-4.25,5.902) 87(-4.75,5.902) 88(-5.25,5.902)
  rect 6.7x6.7 smd paste-3.337: 89(0,0)
  silkscreen extent -6.81,-6.81 6.81,6.81
CSX750F [mil] "Clock Oscillator"
  rect 72x80 smd: 1(0,0) 2(200,0) 3(200,165) 4(0,165)
  TopLayer lines w10: 0,50 0,25
  silkscreen extent -75,-25 275,200
D016_N [mm] "16-Pin Small Outline Integrated Circuit 1.27 mm Pitch, IPC Medium Density"
  oval 2.2x0.6 smd: 1(-2.4,4.445) 2(-2.4,3.175) 3(-2.4,1.905) 4(-2.4,0.635) 5(-2.4,-0.635) 6(-2.4,-1.905) 7(-2.4,-3.175) 8(-2.4,-4.445) 9(2.4,-4.445) 10(2.4,-3.175) 11(2.4,-1.905) 12(2.4,-0.635) 13(2.4,0.635) 14(2.4,1.905) 15(2.4,3.175) 16(2.4,4.445)
  silkscreen extent -2.52,-5 0.9,5.42, body extent -1.95,-4.95 1.95,4.95, height 1.75
DB028 [mm] "SSOP, Plastic; 28 Leads; Body Width 5.3 mm; Pitch 0.65 mm"
  rect 0.4x2.15 smd: 1(-4.225,-3.275) 2(-3.575,-3.275) 3(-2.925,-3.275) 4(-2.275,-3.275) 5(-1.625,-3.275) 6(-0.975,-3.275) 7(-0.325,-3.275) 8(0.325,-3.275) 9(0.975,-3.275) 10(1.625,-3.275) 11(2.275,-3.275) 12(2.925,-3.275) 13(3.575,-3.275) 14(4.225,-3.275) 15(4.225,3.275) 16(3.575,3.275) 17(2.925,3.275) 18(2.275,3.275) 19(1.625,3.275) 20(0.975,3.275) 21(0.325,3.275) 22(-0.325,3.275) 23(-0.975,3.275) 24(-1.625,3.275) 25(-2.275,3.275) 26(-2.925,3.275) 27(-3.575,3.275) 28(-4.225,3.275)
  silkscreen extent -5.25,-3.4 5.25,1.8
DSO-C2/D5.6 [mm] "SM LED; 2 C-Bend Leads; Body 3.5 x 2.8 x 1.9 mm, inc leads (LxWxH typ)"
  rect 1.5x2.6 smd: 1(-1.5,0) 2(1.5,0)
  silkscreen extent -2.65,-1.7 2.95,1.7
FBGA256 [mm] "BGA, 256-Leads, Body 17x17mm, Pitch 1mm"
  round 0.5 smd: A1(-7.5,7.5) A2(-6.5,7.5) A3(-5.5,7.5) A4(-4.5,7.5) A5(-3.5,7.5) A6(-2.5,7.5) A7(-1.5,7.5) A8(-0.5,7.5) A9(0.5,7.5) A10(1.5,7.5) A11(2.5,7.5) A12(3.5,7.5) A13(4.5,7.5) A14(5.5,7.5) A15(6.5,7.5) A16(7.5,7.5) B1(-7.5,6.5) B2(-6.5,6.5) B3(-5.5,6.5) B4(-4.5,6.5) B5(-3.5,6.5) B6(-2.5,6.5) B7(-1.5,6.5) B8(-0.5,6.5) B9(0.5,6.5) B10(1.5,6.5) B11(2.5,6.5) B12(3.5,6.5) B13(4.5,6.5) B14(5.5,6.5) B15(6.5,6.5) B16(7.5,6.5) C1(-7.5,5.5) C2(-6.5,5.5) C3(-5.5,5.5) C4(-4.5,5.5) C5(-3.5,5.5) C6(-2.5,5.5) C7(-1.5,5.5) C8(-0.5,5.5) C9(0.5,5.5) C10(1.5,5.5) C11(2.5,5.5) C12(3.5,5.5) C13(4.5,5.5) C14(5.5,5.5) C15(6.5,5.5) C16(7.5,5.5) D1(-7.5,4.5) D2(-6.5,4.5) D3(-5.5,4.5) D4(-4.5,4.5) D5(-3.5,4.5) D6(-2.5,4.5) D7(-1.5,4.5) D8(-0.5,4.5) D9(0.5,4.5) D10(1.5,4.5) D11(2.5,4.5) D12(3.5,4.5) D13(4.5,4.5) D14(5.5,4.5) D15(6.5,4.5) D16(7.5,4.5) E1(-7.5,3.5) E2(-6.5,3.5) E3(-5.5,3.5) E4(-4.5,3.5) E5(-3.5,3.5) E6(-2.5,3.5) E7(-1.5,3.5) E8(-0.5,3.5) E9(0.5,3.5) E10(1.5,3.5) E11(2.5,3.5) E12(3.5,3.5) E13(4.5,3.5) E14(5.5,3.5) E15(6.5,3.5) E16(7.5,3.5) F1(-7.5,2.5) F2(-6.5,2.5) F3(-5.5,2.5) F4(-4.5,2.5) F5(-3.5,2.5) F6(-2.5,2.5) F7(-1.5,2.5) F8(-0.5,2.5) F9(0.5,2.5) F10(1.5,2.5) F11(2.5,2.5) F12(3.5,2.5) F13(4.5,2.5) F14(5.5,2.5) F15(6.5,2.5) F16(7.5,2.5) G1(-7.5,1.5) G2(-6.5,1.5) G3(-5.5,1.5) G4(-4.5,1.5) G5(-3.5,1.5) G6(-2.5,1.5) G7(-1.5,1.5) G8(-0.5,1.5) G9(0.5,1.5) G10(1.5,1.5) G11(2.5,1.5) G12(3.5,1.5) G13(4.5,1.5) G14(5.5,1.5) G15(6.5,1.5) G16(7.5,1.5) H1(-7.5,0.5) H2(-6.5,0.5) H3(-5.5,0.5) H4(-4.5,0.5) H5(-3.5,0.5) H6(-2.5,0.5) H7(-1.5,0.5) H8(-0.5,0.5) H9(0.5,0.5) H10(1.5,0.5) H11(2.5,0.5) H12(3.5,0.5) H13(4.5,0.5) H14(5.5,0.5) H15(6.5,0.5) H16(7.5,0.5) J1(-7.5,-0.5) J2(-6.5,-0.5) J3(-5.5,-0.5) J4(-4.5,-0.5) J5(-3.5,-0.5) J6(-2.5,-0.5) J7(-1.5,-0.5) J8(-0.5,-0.5) J9(0.5,-0.5) J10(1.5,-0.5) J11(2.5,-0.5) J12(3.5,-0.5) J13(4.5,-0.5) J14(5.5,-0.5) J15(6.5,-0.5) J16(7.5,-0.5) K1(-7.5,-1.5) K2(-6.5,-1.5) K3(-5.5,-1.5) K4(-4.5,-1.5) K5(-3.5,-1.5) K6(-2.5,-1.5) K7(-1.5,-1.5) K8(-0.5,-1.5) K9(0.5,-1.5) K10(1.5,-1.5) K11(2.5,-1.5) K12(3.5,-1.5) K13(4.5,-1.5) K14(5.5,-1.5) K15(6.5,-1.5) K16(7.5,-1.5) L1(-7.5,-2.5) L2(-6.5,-2.5) L3(-5.5,-2.5) L4(-4.5,-2.5) L5(-3.5,-2.5) L6(-2.5,-2.5) L7(-1.5,-2.5) L8(-0.5,-2.5) L9(0.5,-2.5) L10(1.5,-2.5) L11(2.5,-2.5) L12(3.5,-2.5) L13(4.5,-2.5) L14(5.5,-2.5) L15(6.5,-2.5) L16(7.5,-2.5) M1(-7.5,-3.5) M2(-6.5,-3.5) M3(-5.5,-3.5) M4(-4.5,-3.5) M5(-3.5,-3.5) M6(-2.5,-3.5) M7(-1.5,-3.5) M8(-0.5,-3.5) M9(0.5,-3.5) M10(1.5,-3.5) M11(2.5,-3.5) M12(3.5,-3.5) M13(4.5,-3.5) M14(5.5,-3.5) M15(6.5,-3.5) M16(7.5,-3.5) N1(-7.5,-4.5) N2(-6.5,-4.5) N3(-5.5,-4.5) N4(-4.5,-4.5) N5(-3.5,-4.5) N6(-2.5,-4.5) N7(-1.5,-4.5) N8(-0.5,-4.5) N9(0.5,-4.5) N10(1.5,-4.5) N11(2.5,-4.5) N12(3.5,-4.5) N13(4.5,-4.5) N14(5.5,-4.5) N15(6.5,-4.5) N16(7.5,-4.5) P1(-7.5,-5.5) P2(-6.5,-5.5) P3(-5.5,-5.5) P4(-4.5,-5.5) P5(-3.5,-5.5) P6(-2.5,-5.5) P7(-1.5,-5.5) P8(-0.5,-5.5) P9(0.5,-5.5) P10(1.5,-5.5) P11(2.5,-5.5) P12(3.5,-5.5) P13(4.5,-5.5) P14(5.5,-5.5) P15(6.5,-5.5) P16(7.5,-5.5) R1(-7.5,-6.5) R2(-6.5,-6.5) R3(-5.5,-6.5) R4(-4.5,-6.5) R5(-3.5,-6.5) R6(-2.5,-6.5) R7(-1.5,-6.5) R8(-0.5,-6.5) R9(0.5,-6.5) R10(1.5,-6.5) R11(2.5,-6.5) R12(3.5,-6.5) R13(4.5,-6.5) R14(5.5,-6.5) R15(6.5,-6.5) R16(7.5,-6.5) T1(-7.5,-7.5) T2(-6.5,-7.5) T3(-5.5,-7.5) T4(-4.5,-7.5) T5(-3.5,-7.5) T6(-2.5,-7.5) T7(-1.5,-7.5) T8(-0.5,-7.5) T9(0.5,-7.5) T10(1.5,-7.5) T11(2.5,-7.5) T12(3.5,-7.5) T13(4.5,-7.5) T14(5.5,-7.5) T15(6.5,-7.5) T16(7.5,-7.5)
  silkscreen extent -9.27,-8.5 8.5,8.5, body extent -8.5,-8.5 8.5,8.5, height 2.2
HDR2X4 [mm] "Connector; Header; 4x2 Position"
  rect 1.5x1.5 hole 0.9: 1(0,0)
  round 1.5 hole 0.9: 2(0,2.54) 3(2.54,0) 4(2.54,2.54) 5(5.08,0) 6(5.08,2.54) 7(7.62,0) 8(7.62,2.54)
  silkscreen extent -1.27,-1.27 8.89,3.81
HDR2X5 [mm] "Connector; Header; 5x2 Position"
  rect 1.5x1.5 hole 0.9: 1(0,0)
  round 1.5 hole 0.9: 2(0,2.54) 3(2.54,0) 4(2.54,2.54) 5(5.08,0) 6(5.08,2.54) 7(7.62,0) 8(7.62,2.54) 9(10.16,0) 10(10.16,2.54)
  silkscreen extent -1.27,-1.27 11.43,3.81
LAT-10+ [mil]
  rect 35x51 smd: 1(75,0) 2(75,-87) 4(0,0)
  rect 47x51 smd: 3(0,-87)
  silkscreen extent 5,-60 75,-15
MF05A_N [mm] "SOT23, 5-Leads, Body 2.9x1.6mm, Pitch 0.95mm, Lead Span 2.8mm, IPC Medium Density"
  rect 1.1x0.65 smd: 1(-1.2,0.95) 2(-1.2,0) 3(-1.2,-0.95) 4(1.2,-0.95) 5(1.2,0.95)
  silkscreen extent -1.33,-1.55 0.25,1.95, body extent -0.9,-1.55 0.9,1.55, height 1.19
PCI3V32BIT [mil] "Connector; Header; 5x2 Position"
  oval 40x200 smd far side: A1(0,0) A2(50,0) A3(100,0) A4(150,0) A5(200,0) A6(250,0) A7(300,0) A8(350,0) A9(400,0) A10(450,0) A11(500,0) A14(650,0) A15(700,0) A16(750,0) A17(800,0) A18(850,0) A19(900,0) A20(950,0) A21(1000,0) A22(1050,0) A23(1100,0) A24(1150,0) A25(1200,0) A26(1250,0) A27(1300,0) A28(1350,0) A29(1400,0) A30(1450,0) A31(1500,0) A32(1550,0) A33(1600,0) A34(1650,0) A35(1700,0) A36(1750,0) A37(1800,0) A38(1850,0) A39(1900,0) A40(1950,0) A41(2000,0) A42(2050,0) A43(2100,0) A44(2150,0) A45(2200,0) A46(2250,0) A47(2300,0) A48(2350,0) A49(2400,0) A50(2450,0) A51(2500,0) A52(2550,0) A53(2600,0) A54(2650,0) A55(2700,0) A56(2750,0) A57(2800,0) A58(2850,0) A59(2900,0) A60(2950,0) A61(3000,0) A62(3050,0)
  oval 40x200 smd: B1(0,0) B2(50,0) B3(100,0) B4(150,0) B5(200,0) B6(250,0) B7(300,0) B8(350,0) B9(400,0) B10(450,0) B11(500,0) B14(650,0) B15(700,0) B16(750,0) B17(800,0) B18(850,0) B19(900,0) B20(950,0) B21(1000,0) B22(1050,0) B23(1100,0) B24(1150,0) B25(1200,0) B26(1250,0) B27(1300,0) B28(1350,0) B29(1400,0) B30(1450,0) B31(1500,0) B32(1550,0) B33(1600,0) B34(1650,0) B35(1700,0) B36(1750,0) B37(1800,0) B38(1850,0) B39(1900,0) B40(1950,0) B41(2000,0) B42(2050,0) B43(2100,0) B44(2150,0) B45(2200,0) B46(2250,0) B47(2300,0) B48(2350,0) B49(2400,0) B50(2450,0) B51(2500,0) B52(2550,0) B53(2600,0) B54(2650,0) B55(2700,0) B56(2750,0) B57(2800,0) B58(2850,0) B59(2900,0) B60(2950,0) B61(3000,0) B62(3050,0)
QFN50P400X400-24VAN [mm] "24-Pin Plastic Quad Flat No-Lead 0.5 mm Pitch"
  oval 0.8x0.25 smd: 1(-2,1.25) 2(-2,0.75) 3(-2,0.25) 4(-2,-0.25) 5(-2,-0.75) 6(-2,-1.25) 13(2,-1.25) 14(2,-0.75) 15(2,-0.25) 16(2,0.25) 17(2,0.75) 18(2,1.25)
  oval 0.25x0.8 smd: 7(-1.25,-2) 8(-0.75,-2) 9(-0.25,-2) 10(0.25,-2) 11(0.75,-2) 12(1.25,-2) 19(1.25,2) 20(0.75,2) 21(0.25,2) 22(-0.25,2) 23(-0.75,2) 24(-1.25,2)
  rect 2.6x2.6 smd: 25(0,0)
  silkscreen extent -3.08,-2.1 2.1,2.1, body extent -2.07,-2.07 2.07,2.07, height 1
RESC3216L [mm] "Chip Resistor, Body 3.1x1.6mm, IPC High Density"
  rect 1.1x1.7 smd: 1(-1.35,0) 2(1.35,0)
  silkscreen extent -0.4,-0.75 0.4,0.75, body extent -1.68,-0.87 1.68,0.87, height 2.54
SALF-325 [mil]
  rect 150x100 smd: 1(0,0)
  oval 150x100 smd: 2(320,0) 3(0,-200) 4(320,-200) 5(0,-400) 6(320,-400) 7(0,-600) 8(320,-600)
  silkscreen extent 110,-700 210,100
SMA_Edgecon_31milthick [mil]
  rect 45x200 smd: 1(-173,346)
  rect 95x200 smd: 2(-286.61,350) 2(-61.42,350)
  rect 95x200 smd far side: 2(-286.61,350) 2(-61.42,350)
  silkscreen extent -450,450 125,450
SOD323 [mm] "SOD-323/SC-76; 2 Leads; Body 1.7 x 1.3 mm, (LxW)"
  rect 1.45x0.55 smd: 1(1.175,0) 2(-1.175,0)
  silkscreen extent -0.95,-0.75 0.95,0.75
SOIC8_L [mm] "SOIC, 8-Leads, Body 4.9x3.9mm, Pitch 1.27mm, IPC High Density"
  oval 1.9x0.6 smd: 1(-2.35,1.905) 2(-2.35,0.635) 3(-2.35,-0.635) 4(-2.35,-1.905) 5(2.35,-1.905) 6(2.35,-0.635) 7(2.35,0.635) 8(2.35,1.905)
  silkscreen extent -2.47,-2.5 1,2.88, body extent -1.95,-2.45 1.95,2.45, height 1.75
TC1-1T+ [mil]
  rect 65x30 smd: 1(0,0)
  oval 65x30 smd: 2(0,-50) 3(0,-100) 4(125,-100) 5(125,-50) 6(125,0)
  silkscreen extent 50,-125 75,25
TS3B_N [mm] "D2-PAK, 4-Leads, Body 8.6x10.2mm, Pitch 2.54mm, Lead Span 14.2mm, IPC Medium Density"
  rect 3.3x1.05 smd: 1(-6.05,2.54) 2(-6.05,0) 3(-6.05,-2.54)
  rect 8.4x10.5 smd: 4(3.5,0)
  silkscreen extent -6.17,-5.2 -1.1,5.2, body extent -2.6,-5.2 6.29,5.2, height 4.64
TSOP65P640-28AM [mm] "TSOP, 28-Leads, Body 9.7x4.4mm, Pitch 0.65mm, IPC Low Density"
  oval 2x0.35 smd: 1(-2.9,4.225) 2(-2.9,3.575) 3(-2.9,2.925) 4(-2.9,2.275) 5(-2.9,1.625) 6(-2.9,0.975) 7(-2.9,0.325) 8(-2.9,-0.325) 9(-2.9,-0.975) 10(-2.9,-1.625) 11(-2.9,-2.275) 12(-2.9,-2.925) 13(-2.9,-3.575) 14(-2.9,-4.225) 15(2.9,-4.225) 16(2.9,-3.575) 17(2.9,-2.925) 18(2.9,-2.275) 19(2.9,-1.625) 20(2.9,-0.975) 21(2.9,-0.325) 22(2.9,0.325) 23(2.9,0.975) 24(2.9,1.625) 25(2.9,2.275) 26(2.9,2.925) 27(2.9,3.575) 28(2.9,4.225)
  silkscreen extent -3.03,-4.9 1.5,5.07, body extent -2.25,-4.9 2.25,4.9, height 1.1
TSSOP16 [mm] "Shrink Small Outline; 16 Leads; Body Width 4.4 mm; Pitch 0.65 mm"
  rect 0.3x1.65 smd: 1(-2.275,-2.775) 2(-1.625,-2.775) 3(-0.975,-2.775) 4(-0.325,-2.775) 5(0.325,-2.775) 6(0.975,-2.775) 7(1.625,-2.775) 8(2.275,-2.775) 9(2.275,2.775) 10(1.625,2.775) 11(0.975,2.775) 12(0.325,2.775) 13(-0.325,2.775) 14(-0.975,2.775) 15(-1.625,2.775) 16(-2.275,2.775)
  silkscreen extent -3.1,-2.9 2.55,1.55

## Part data
C1 C2 C3 C4 C5 C6 C7 C8 C9 C10 C11 C12 C13 C14 C15 C16 C17 C18 C19 C20 C21 C22 C23 C24 C25 C26 C27 C28 C29 C30 C31 C32 C33 C34 C35 C36 C37 C40 C41 C44 C45 C48 C49 C52 C53 C58 C59 C60 C61 C65 C66 C67 C68 C69 C70 C71 C72 C73 C75 C79 C80 C81 C82 C89 C90 C91 C92 C93: "Capacitor (Semiconductor SIM Model)"
C38 C39 C42 C43 C46 C47 C50 C51 C54 C55 C56 C57 C63 C64: "Polarized Capacitor (Radial)"
C62: library part Cap2, "Capacitor"
C74 C76 C77 C78 C83 C84 C85 C86 C87 C88: "Capacitor"
D1 D2 D3 D4: library part Diode, "Default Diode"
D5 D6 D7 D8 D9 D10 D11 D12: "Typical BLUE SiC LED"
J1: "USB 1.1, Right Angle, Thru-Hole, B Type, Receptacle, 4 Position, Black"
P1 P2: library part "Header 5X2", "Header, 5-Pin, Dual row"
P3: "Card, 120-Position"
P4: library part "Header 4X2", "Header, 4-Pin, Dual row"
P5: library part BMIS-207, "Laird Shield"
P6 P7: library part SMB, "SMA Straight Connector"
R1 R2 R3 R4 R5 R6 R7 R8 R9 R10 R11 R12 R13 R14 R15 R16 R17 R18 R19 R20 R21 R22: library part Res3, "Resistor"
T1 T2 T3: library part "Trans CT", "Center-Tapped Transformer (Coupled Inductor Model)"
U1: "Cyclone IV Family FPGA, 2V Core, 153 I/O Pins, 4 PLLs, 256-Pin FBGA, Speed Grade 8, Commercial Grade"
U2: library part EPCS4SI8N, "EPCS4 Series, In-system programmable 3.3V serial configuration device, 8-Pin SOIC, 4-Megabit, Industrial Grade, Pb-Free"
U3: "Imported"
U4 U5 U6 U8 U9 U10 U12 U20: "Differential Line Receivers"
U7 U11: "Differential Line Transmitter"
U13 U14 U15 U17 U19: "1.5A Low Dropout Positive Regulators"
U16: library part LM1086IS-3.3, "1.5A Low Dropout Positive Regulators"
U18: "Micropower 150 mA Voltage Regulator in SOT-23 Package For Output Voltages [Less_Than_Or_Equal] 1.2V"
U22: "analoger Abschwächer"
U23: "8-bit LED driver (Serial)"
U24: "FT245R USB FIFO"
U25: library part CSX750F, "Clock Oscillator"
U28: library part LAT-30+

## Free pads (board coordinates)
  round 1.27 hole 3.175: 1(135.5,9.2) 2(135.775,96.675) 4(0,0)

## Via types
v1: diameter 0.5, hole 0.25, TopLayer to BottomLayer, 241 vias
v2: diameter 0.5, hole 0.25, TopLayer to BottomLayer, tented top, 114 vias
v3: diameter 1.27, hole 0.711, TopLayer to BottomLayer, 70 vias
v4: diameter 0.66, hole 0.33, TopLayer to BottomLayer, tented top, 4 vias

## Nets (pads, with @x,y where several pads share a name; then routed paths per layer and width w, separated by ;. In a path a pad name is that pad's centre, name@x,y a point inside that pad or via, vN(x,y) a via of type N, cw(c..) or ccw(c..) an arc to the next point about the centre after c; other vN are vias at no path point)
1.2V_DIG: C3.1 C7.1 C18.2 C21.2 C55.1 C61.2 C62.1 C89.1 C90.1 U1.D4 U1.D13 U1.F7 U1.F11 U1.G6 U1.G7 U1.G8 U1.G9 U1.G10 U1.H6 U1.H11 U1.J6 U1.J12 U1.K7 U1.K9 U1.K10 U1.K11 U1.L6 U1.M9 U1.M11 U1.N4 U1.N13 U18.5 | length 126.7
  TopLayer w0.125: v2(85.9,58.775) U1.D4@86.4,58.275 ; v2(85.9,67.775) U1.D13@86.4,67.275 ; U1.F7@88.4,61.275 U1.G7@89.4,61.275 ; U1.F11@88.4,65.275 v2(88.9,64.775) U1.G10@89.4,64.275 U1.G9@89.4,63.275 U1.G8@89.4,62.275 U1.G7@89.4,61.275 ; v2(89.9,65.775) U1.H11@90.4,65.275 ; v2(90.9,66.775) U1.J12@91.4,66.275 ; U1.J6@91.4,60.275 U1.H6@90.4,60.275 U1.G6@89.4,60.275 U1.G7@89.4,61.275 ; v2(91.9,64.775) U1.K10@92.4,64.275 ; U1.K7@92.4,61.275 v2(92.9,60.775) U1.L6@93.4,60.275 ; U1.K9@92.4,63.275 U1.K10@92.4,64.275 ; U1.K11@92.4,65.275 U1.K10@92.4,64.275 ; v2(93.9,63.775) U1.M9@94.4,63.275 ; v2(93.9,65.775) U1.M11@94.4,65.275 ; v2(94.9,58.775) U1.N4@95.4,58.275 ; v2(94.9,67.775) U1.N13@95.4,67.275
  TopLayer w0.2: C7.1@106.8,50.525 v1@108.35,50.525 ; C62.1@118.298,51.568 118.298,49.977 v1(118.3,49.975) v1(117.2,49.975) v1(117.2,49.075) v1(118.3,49.075) ; C62.1@118.4,51.375 120.7,51.375 120.7,50.175 122.4,48.475 125.4,48.475 126.105,47.77 C55.1@127.95,47.77
  Power w0.2: v2(85.9,58.775) 86.4,59.275 86.4,67.275 ; v2(85.9,67.775) 86.4,67.275 ; v2(88.9,64.775) v2(89.9,65.775) 90.4,65.275 91.4,65.275 v2(91.9,64.775) 93.4,64.775 ; v2(90.9,66.775) 90.9,67.275 ; v2(93.9,63.775) 93.4,64.275 ; v2(94.9,58.775) 93.4,58.775 ; 103.5,67.775 102,66.275 95.4,66.275 95.4,67.275 v2(94.9,67.775) 94.4,67.275 93.9,67.275 ; 103.5,67.775 v1(103.5,68.375) ; v1@117.225,49.95 116.7,50.475 v1(108.4,50.475) 99.2,50.475 93.4,56.275 93.4,58.775 ; 86.4,67.275 90.9,67.275 ; 90.9,67.275 93.9,67.275 ; 93.4,58.775 93.4,60.275 v2(92.9,60.775) 93.4,61.275 93.4,64.275 ; 93.4,64.275 93.4,64.775 ; 93.4,64.775 93.4,65.275 v2(93.9,65.775) 93.9,67.275
  BottomLayer w0.125: v2(94.9,58.775) 95.4,58.275 101.075,58.275 C18.2@101.95,57.4
  BottomLayer w0.2: C90.1@101.9,69.675 101.9,68.675 102.2,68.375 v1(103.5,68.375) ; C89.1@103.45,64.925 C89.1@103.45,64.975 C3.1@103.45,66.775 103.45,68.325 v1(103.5,68.375) ; C21.2@103.7,69.775 103.7,68.575 v1(103.5,68.375)
1.8V_ANA: C29.1 C57.1 C66.2 C71.1 U3.32 U3.56 U3.57 U19.2 | length 21.3
  TopLayer w0.2: v1@12.546,9.921 v1(12.546,9.021) v1(13.546,9.021) v1(14.546,9.021) v1(14.546,10.029) v1(13.554,10.029) v1(12.554,10.029) C66.2@12.554,11.431 ; v1(53.4,63.375) 53.514,63.489 U3.32@55.178,63.489 ; U3.56@61.33,56.837 61.33,55.745 v1(61.5,55.575) 61.83,55.905 U3.57@61.83,56.837
  TopLayer w0.8: C66.2@12.554,11.431 13.3,12.177 13.3,13.975 14.344,15.019 U19.2@14.344,17.573
  BottomLayer w0.2: C29.1@52.2,63.375 v1(53.4,63.375) ; v1(61.5,55.575) 61.8,55.275 C71.1@61.8,54.325
1.8V_DIG: C26.1 C47.1 C49.2 U3.6 U3.23 U3.73 U15.2 | length 114.7
  TopLayer w0.2: v1(54.3,69.675) 54.3,68.175 54.486,67.989 U3.23@55.178,67.989 ; U3.6@63.83,68.641 63.83,69.805 v1(64,69.975) ; U3.73@66.982,60.489 69.914,60.489 v1(70.1,60.675) ; C49.2@104.248,8.891 v1(104.248,7.327) v1(105.548,7.327) v1(106.752,7.327) v1(106.752,6.123) v1(105.548,6.123) v1(104.252,6.123) ; C47.1@104.3,11.175 C47.1@105.784,12.659
  TopLayer w0.5: C49.2@104.3,8.775 C47.1@104.3,11.175
  TopLayer w0.8: C47.1@105.784,12.659 U15.2@105.784,16.049
  Power w0.5: v1(54.3,69.675) 54.6,69.975 64.8,69.975 64.8,63.675 67.1,63.675 v1(70.1,60.675) 70.1,56.925 ; v1(64,69.975) 64.8,69.175 ; 70.1,56.775 70.1,56.925 ; 103.4,9.675 103.4,21.375 70.1,54.675 70.1,56.925
  BottomLayer w0.2: C26.1@51.9,69.775 52,69.675 v1(54.3,69.675)
2.5V_DIG: C17.2 C20.1 C53.2 C64.1 C92.2 U1.F5 U1.F12 U1.L5 U1.L12 U16.2 | length 120
  TopLayer w0.125: v2(87.9,59.775) U1.F5@88.4,59.275 ; v2(87.9,66.775) U1.F12@88.4,66.275 ; v2(92.9,59.775) U1.L5@93.4,59.275 ; v2(92.9,66.775) U1.L12@93.4,66.275
  TopLayer w0.2: C53.2@118.98,9.155 C53.2@118.98,8.637 v1(120.462,8.637) v1(121.762,8.637) v1(121.762,7.413) v1(120.438,7.413)
  TopLayer w0.8: C53.2@118.98,9.155 120.2,10.375 120.2,12.875 121.3,13.975 U16.2@121.3,16.275
  Power w0.2: v2(87.9,59.775) 88.4,60.275 ; v2(87.9,66.775) 88.4,66.275 ; 92.4,36.775 92.4,52.175 ; v2(92.9,66.775) 92.4,66.275 88.4,66.275 ; v1(94.6,52.175) 92.4,52.175 ; v1@121.7,8.575 121.7,18.175 ; 88.4,60.275 92.4,60.275 v2(92.9,59.775) 92.4,59.275 92.4,52.175 ; 88.4,60.275 88.4,66.275
  Power w0.5: 92.4,36.775 105.3,23.875 116,23.875 121.7,18.175
  BottomLayer w0.125: C17.2@77.8,68.275 78.75,68.275 80.75,66.275 87.4,66.275 v2(87.9,66.775)
  BottomLayer w0.2: C92.2@77.65,69.875 77.65,68.275 C17.2@77.7,68.225 ; C20.1@94.2,50.725 94.2,51.775 v1(94.6,52.175)
3.3V_ANA: C27.1 C28.1 C42.1 C45.2 C87.2 U3.34 U3.36 U3.39 U3.40 U3.43 U3.47 U3.50 U3.52 U3.53 U3.60 U14.2 U21.24 | length 68.8
  TopLayer w0.2: C45.2@26.778,11.431 26.856,11.431 v1(28.056,11.431) ; v1(53.5,60.475) 53.986,59.989 ; v1(53.5,61.575) 53.586,61.489 U3.36@55.178,61.489 ; v1(54,62.275) 54.214,62.489 U3.34@55.178,62.489 ; v1(54.2,57.775) 54.414,57.989 U3.43@55.178,57.989 ; U3.40@55.178,59.489 54.486,59.489 53.986,59.989 ; U3.39@55.178,59.989 53.986,59.989 ; v1(56.5,55.675) 56.83,56.005 U3.47@56.83,56.837 ; v1(58.3,55.675) 58.33,55.705 U3.50@58.33,56.837 ; v1(59.1,55.675) 59.33,55.905 U3.52@59.33,56.837 ; 59.4,55.975 59.7,55.975 59.83,56.105 U3.53@59.83,56.837 ; U3.60@63.33,56.837 63.33,55.745 v1(63.8,55.275) ; v1(28.056,11.431) v1(28.056,10.331) v1(29.044,10.331) v1(29.044,11.431) v1(28.056,11.431)
  TopLayer w0.8: C45.2@26.7,11.275 26.856,11.431 27.528,12.103 C42.1@27.528,13.971 ; C42.1@27.6,13.975 28.568,14.943 U14.2@28.568,17.573
  Power w0.2: 64,55.875 64.1,55.775
  BottomLayer w0.2: C87.2@45.8,86.075 46.675,85.2 U21.24@48.5,85.2 ; U21.24@48.475,85.175 50.475,85.175 51.75,83.9 51.75,79.85 53.8,77.8 53.8,76.1 53.125,75.425 50.125,75.425 48.4,73.7 48.4,62.5 48.875,62.025 52.95,62.025 53.4,61.575 v1(53.5,61.575) C28.1@52.5,60.575 ; C28.1@52.25,60.575 52.4,60.575 C28.1@52.5,60.575 ; C27.1@53.2,57.775 v1(54.2,57.775) ; v1@53.4,60.575 C28.1@52.5,60.575